# EAGLE board LabAccessBoard (EAGLE 9.2.2)
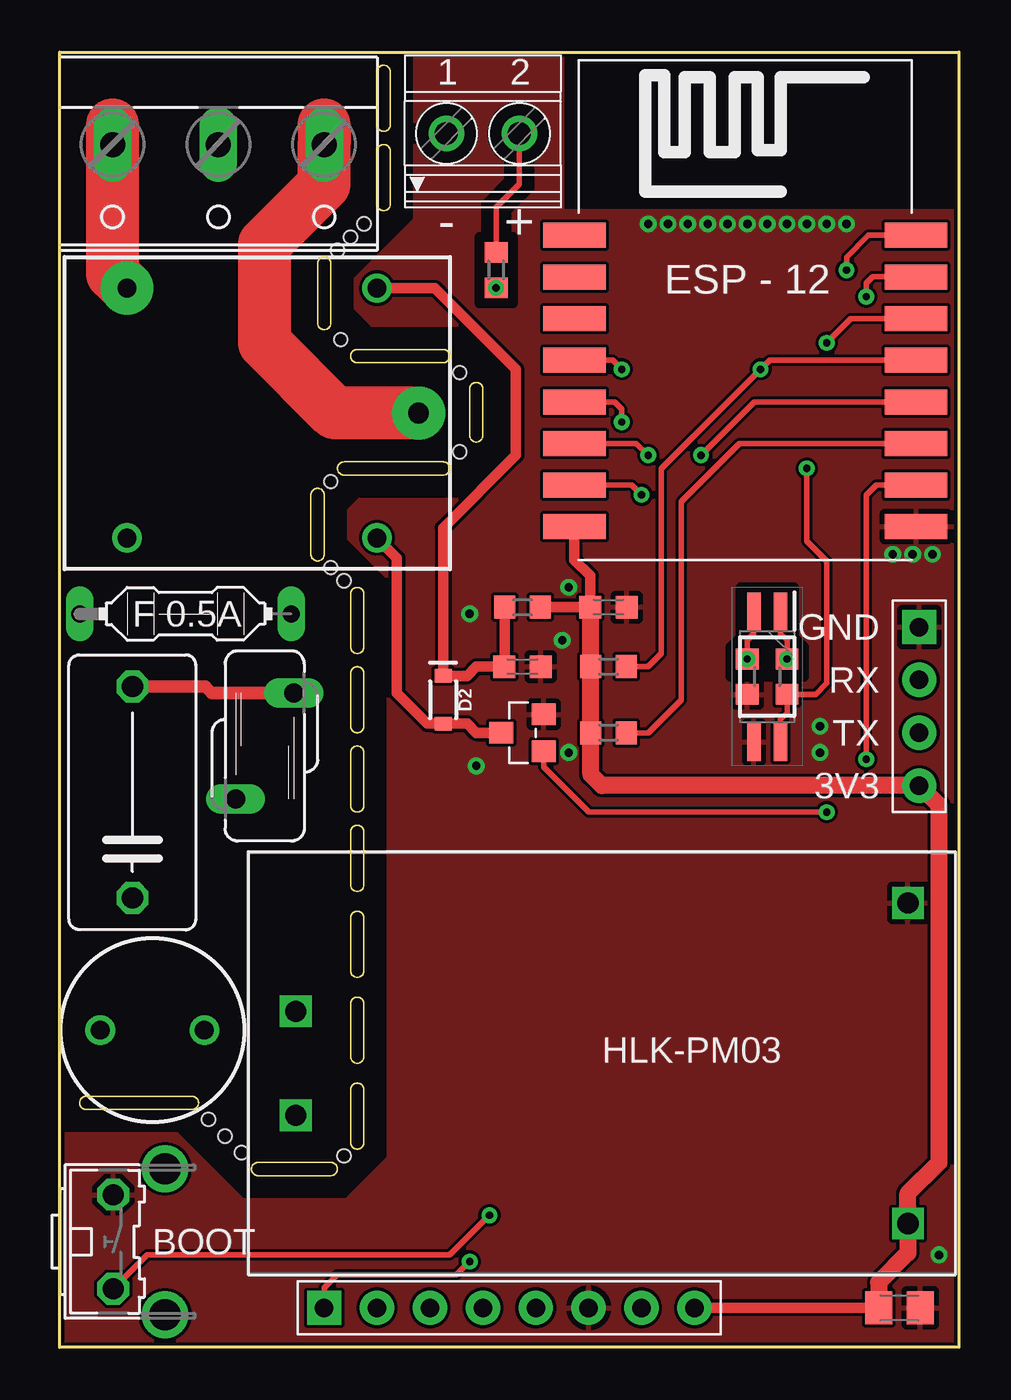
[diagram p0: board, top side]
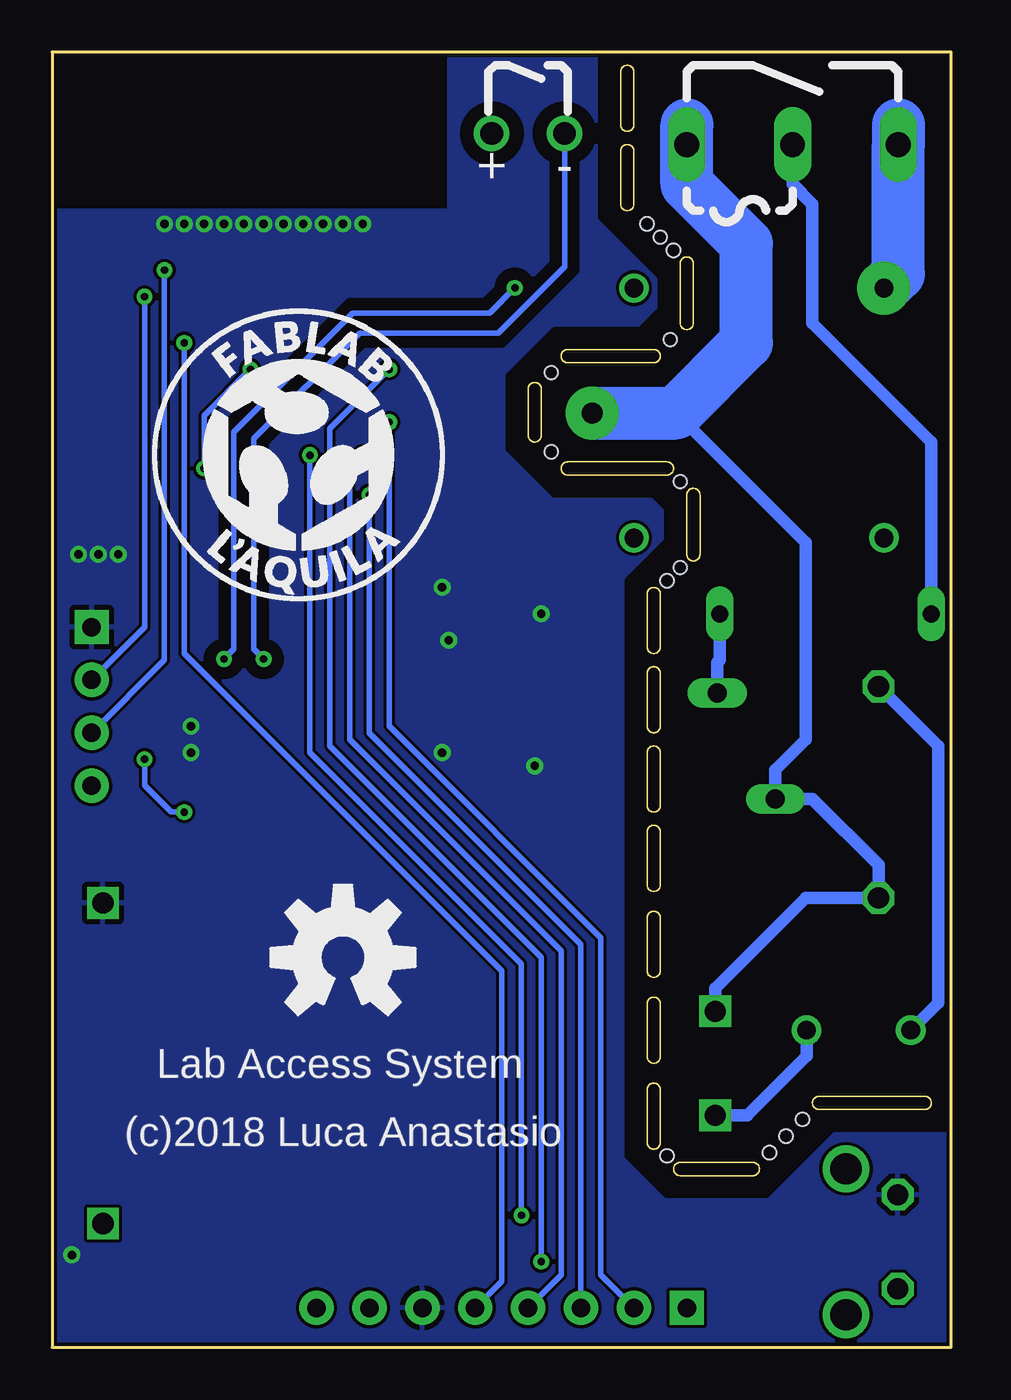
[diagram p1: board, bottom side, seen from below]

Size 43.18 x 62.23 mm. Coordinates in mm from the lower left corner, seen from the top.
Outline: 0,0 0,62.23 43.18,62.23 43.18,0 0,0
Outline: 12.7,52.39 arc90 12.38,52.07 12.38,49.21 arc90 12.7,48.9 arc90 13.02,49.21 13.02,52.07 arc90 12.7,52.39
Outline: 15.56,57.78 arc90 15.24,57.47 15.24,54.93 arc90 15.56,54.61 arc90 15.88,54.93 15.88,57.47 arc90 15.56,57.78
Outline: 15.56,61.59 arc90 15.24,61.28 15.24,58.74 arc90 15.56,58.42 arc90 15.88,58.74 15.88,61.28 arc90 15.56,61.59
Outline: 14.29,36.51 arc90 13.97,36.2 13.97,33.66 arc90 14.29,33.34 arc90 14.61,33.66 14.61,36.2 arc90 14.29,36.51
Outline: 12.38,41.27 arc90 12.06,40.96 12.06,38.1 arc90 12.38,37.78 arc90 12.7,38.1 12.7,40.96 arc90 12.38,41.27
Outline: 13.97,47.62 arc90 14.29,47.31 18.41,47.31 arc90 18.73,47.62 arc90 18.41,47.94 14.29,47.94 arc90 13.97,47.62
Outline: 13.34,42.23 arc90 13.65,41.91 18.41,41.91 arc90 18.73,42.23 arc90 18.41,42.55 13.65,42.55 arc90 13.34,42.23
Outline: 20,46.35 arc90 19.68,46.04 19.68,43.81 arc90 20,43.5 arc90 20.32,43.81 20.32,46.04 arc90 20,46.35
Outline: 14.29,32.7 arc90 13.97,32.38 13.97,29.84 arc90 14.29,29.53 arc90 14.61,29.84 14.61,32.38 arc90 14.29,32.7
Outline: 14.29,28.89 arc90 13.97,28.57 13.97,26.04 arc90 14.29,25.72 arc90 14.61,26.04 14.61,28.57 arc90 14.29,28.89
Outline: 14.29,25.08 arc90 13.97,24.77 13.97,22.23 arc90 14.29,21.91 arc90 14.61,22.23 14.61,24.77 arc90 14.29,25.08
Outline: 14.29,20.95 arc90 13.97,20.64 13.97,18.1 arc90 14.29,17.78 arc90 14.61,18.1 14.61,20.64 arc90 14.29,20.95
Outline: 14.29,16.83 arc90 13.97,16.51 13.97,13.97 arc90 14.29,13.65 arc90 14.61,13.97 14.61,16.51 arc90 14.29,16.83
Outline: 14.29,12.7 arc90 13.97,12.38 13.97,9.84 arc90 14.29,9.53 arc90 14.61,9.84 14.61,12.38 arc90 14.29,12.7
Outline: 0.95,11.75 arc90 1.27,11.43 6.35,11.43 arc90 6.67,11.75 arc90 6.35,12.06 1.27,12.06 arc90 0.95,11.75
Outline: 9.21,8.57 arc90 9.53,8.26 13.02,8.26 arc90 13.34,8.57 arc90 13.02,8.89 9.53,8.89 arc90 9.21,8.57
Copper layers (1*16): Top 0.035mm / dielectric 1.5mm / Bottom 0.035mm
Design rules "default *": minimum track width 6mil, minimum drill 0.35mm, track to track 6mil, track to pad 6mil, pad to pad 6mil, via to via 6mil, smd to smd 6mil, copper to edge 6mil, drill to drill 6mil, minimum pad ring 10mil, minimum via ring 8mil, stop-mask expansion 4mil, vias tented up to drill 20mil, thermal gap 10mil
Holes 0.64 mm at 13.97,53.34 13.34,52.7 14.61,53.98 13.49,48.42 19.21,46.83 19.21,43.02 13.02,41.59 13.02,37.47 13.65,36.83 13.65,9.21 7.94,10.16 7.14,10.95 8.73,9.37
tRestrict: area 20.8,57 to 23.3,59.6; area 17.3,57 to 19.8,59.6; area 24.4,54.9 to 43.2,62.2; 59 lines
bRestrict: area 17.3,57 to 19.8,59.6; area 20.8,57 to 23.3,59.6; area 32.3,32.4 to 33.7,33.8; area 20.2,50.2 to 21.7,51.6; area 34.2,32.4 to 35.6,33.8; area 24.4,54.9 to 43.2,62.2; 49 lines

## Footprints (pad centres in the part's own frame; a part is rotated, then mirrored left to right if it is on the bottom)
C0603K = smd 1.05 x 1.08: 1 -0.875,0; 2 0.875,0
C0805K = smd 1.3 x 1.6: 1 -1,0; 2 1,0
C102-064X133 = drill 1.016 octagon: 1 -5.08,0; 2 5.08,0
SOD-323 = smd 0.63 x 0.83: A 1.15,0; C -1.15,0
PICOFUSE = drill 0.813 long: 1 -5.08,0; 2 5.08,0
HLK-PM01 = drill 1.016 square: P$1 -14.7,2.5; P$2 -14.7,-2.5; P$3 14.7,7.7; P$4 14.7,-7.7
SOIC127P700X190-4N = smd 1.8 x 0.65: 1 -3.15,0.635; 2 -3.15,-0.635; 3 3.15,-0.635; 4 3.15,0.635
H4-2.54 = drill 0.889 pad 1.651 square: 1 0,3.81 | drill 0.889 pad 1.651: 2 0,1.27; 3 0,-1.27; 4 0,-3.81
H8-2.54 = drill 0.889 pad 1.651 square: 1 0,8.89 | drill 0.889 pad 1.651: 2 0,6.35; 3 0,3.81; 4 0,1.27; 5 0,-1.27; 6 0,-3.81; 7 0,-6.35; 8 0,-8.89
SOT-23 = smd 1.016 x 1.143: 1 -0.889,-1.016; 2 0.889,-1.016; 3 0,1.016
R0603 = smd 1 x 1.1: 1 -0.85,0; 2 0.85,0
S07K250 = drill 0.914 long: 1 -1.397,-2.54; 2 1.397,2.54
B3F-31XX = drill 1.016 octagon: 1 -2.261,-1.245; 2 2.261,-1.245 | drill 1.499 pad 2.159: 3 -3.505,1.245; 4 3.505,1.245
ESP12-SMD = smd 3 x 1.2: ADC -8.3,3.8; CH_PD -8.3,1.8; GND 8.1,-8.2; GPIO0 8.1,-2.2; GPIO2 8.1,-4.2; GPIO4 8.1,1.8; GPIO5 8.1,-0.2; GPIO12 -8.3,-4.2; GPIO13 -8.3,-6.2; GPIO14 -8.3,-2.2; GPIO15 8.1,-6.2; GPIO16 -8.3,-0.2; RESET -8.3,5.8; RXD0 8.1,3.8; TXD0 8.1,5.8; VCC -8.3,-8.2
SRD-0XVDC-SL-C = drill 0.9: COIL0 -5.39,-6.12; COIL1 -5.39,5.88; SWCLOSED 6.61,5.88 | drill 1 pad 2.54: SWCOMMON -7.39,-0.12 | drill 0.9 pad 2.54: SWOPEN 6.61,-6.12
6000-XXXX-RC = drill 0.9 pad 1.422: 1 -2.5,0; 2 2.5,0
1751248 = drill 1.1 pad 1.7: 1 -1.75,-0.1; 2 1.75,-0.1
W237-3E = drill 1.194 long: 1 -5.08,-0.635; 2 0,-0.635; 3 5.08,-0.635

## Placement (x,y rotation side)
C1  1uF  [C0603K]  22.23,32.7 0 top
C2  10uF  [C0805K]  40.32,1.91 180 top
C5  100nF  [C102-064X133]  3.49,26.67 90 top
C6  1uF  [C0603K]  26.35,35.56 180 top
D2  250mA/100V  [SOD-323]  18.41,31.11 270 top
F1  FUSEPICOFUSE  [PICOFUSE]  6.03,35.24 0 top
HLK-PM03  HLK-PM03  [HLK-PM01]  26.04,13.65 0 top
IC1  TLP281  [SOIC127P700X190-4N]  33.97,32.23 270 top
J1  4p-2.54  [H4-2.54]  41.27,30.8 0 top
JP1  8p-2.54  [H8-2.54]  21.59,1.91 90 top
Q1  AO3400  [SOT-23]  22.23,29.53 90 top
R1  ROC  [R0603]  20.95,51.75 270 top
R2  0  [R0603]  34.92,32.23 270 top
R3  10k  [R0603]  26.35,29.53 0 top
R4  250V  [S07K250]  9.84,28.89 180 top
R5  2R  [R0603]  22.23,35.56 180 top
R6  RSW  [R0603]  26.35,32.7 0 top
R7  0  [R0603]  33.02,32.23 270 top
S1  [B3F-31XX]  3.81,5.08 270 top
U1  [ESP12-SMD]  33.02,47.62 0 top
U$1  SRD-03VDC-SL-C  [SRD-0XVDC-SL-C]  9.84,44.77 180 top
U$2  10mH  [6000-XXXX-RC]  4.45,15.24 180 top
U$3  [OSHW-LOGO-L]  29.21,18.73 0 bottom
X1  1751248  [1751248]  20.32,58.42 0 top
X2  [W237-3E]  7.62,57.15 180 top

## Library data of the parts
C1 C2 C5 C6 = rcl; SPICEPREFIX: C
D2 = SparkFun-DiscreteSemi; PROD_ID: DIO-09646
F1 = fuse; OC_FARNELL: unknown; OC_NEWARK: unknown
HLK-PM03 = HLK-PM01
IC1 = TLP281(GB-TP_F); ARROW_PART_NUMBER: TLP281(GB-TP,F); DESCRIPTION: PROGRAMMABLE CONTROLLERS AC/DC-INPUT MODULE PC CARD MODEM(PCMCIA); HEIGHT: 1.9mm; MANUFACTURER_NAME: Toshiba; MANUFACTURER_PART_NUMBER: TLP281(GB-TP,F)
J1 = Seeed-Connector; MPN: P125-1104A0BS116A1
JP1 = Seeed-Connector; MPN: P125-1108A1BS116A1
Q1 = Seeed-Transistor; MPN: 2N7002,215
R1-R3 R5-R7 = resistor
R4 = varistor
S1 = switch-omron; MPN: B3F-3100; OC_FARNELL: 959704; OC_NEWARK: 36M3582
U1 = esp8266modules
U$1 = SRD-0XVDC-SL-C
U$2 = rcl; SPICEPREFIX: L
U$3 = SparkFun-Aesthetics
X1 = con-phoenix-350; OC_FARNELL: unknown; OC_NEWARK: unknown
X2 = con-wago-508; OC_FARNELL: unknown; OC_NEWARK: unknown

## Nets
+3V3: C2.2 C6.2 HLK-PM03.P$4 J1.4 JP1.8 R3.1 R5.1 R6.1 U1.VCC
A: IC1.1 R1.2 R2.1
ADC: U1.ADC
CS: JP1.1 U1.GPIO16
EXTSW: IC1.4 R2.2 R6.2 U1.GPIO5
GND: C1.2 C2.1 C6.1 HLK-PM03.P$3 IC1.3 J1.1 JP1.6 Q1.2 R7.2 S1.1 U1.GND
GPIO2: R3.2 U1.GPIO2
IRQ: JP1.5 U1.GPIO4
K: IC1.2 R7.1 X1.1
MISO: JP1.4 U1.GPIO12
MOSI: JP1.3 U1.GPIO13
N$1: U$1.SWOPEN X2.3
N$2: C5.1 HLK-PM03.P$1 R4.2 U$1.SWCOMMON X2.1
N$3: C5.2 F1.2 R4.1 U$2.2
N$4: F1.1 X2.2
N$5: C1.1 D2.C R5.2 U$1.COIL0
N$6: HLK-PM03.P$2 U$2.1
N$8: D2.A Q1.3 U$1.COIL1
N$9: R1.1 X1.2
RLY: Q1.1 U1.GPIO15
RX: J1.2 U1.RXD0
SCK: JP1.2 U1.GPIO14
SW: S1.2 U1.GPIO0
TX: J1.3 U1.TXD0

## Tracks (layer width: path | path; a pad name or v marks a point on that pad's centre or on a via)
+3V3
  Top 0.508: U1.VCC 24.72,37.83 25.48,37.07 C6.2 R5.1 | C2.2 JP1.8
  Top 0.813: C6.2 25.5,35.53 R6.1 R3.1 25.5,27.52 26.04,26.99 J1.4 42.23,26.04 42.23,8.89 40.73,7.4 HLK-PM03.P$4 40.73,4.54 39.32,3.13 C2.2
A  (via drill 0.35)
  Top 0.254: IC1.1 34.61,34.29 34.92,33.97 R2.1
  Bottom 0.254: R1.2 22.17,49.69 28.73,49.69 34.45,43.97 34.45,33.55 R2.1
  other vias: 20.95,50.9 34.92,33.08
CS  (via drill 0.35)
  Top 0.254: JP1.1 12.7,2.86 13.34,3.49 19.05,3.49 v19.68,4.13 | U1.GPIO16 26.55,47.42 v26.99,46.99
  Bottom 0.254: v19.68,4.13 19.68,18.73 29.84,28.89 29.84,44.13 v26.99,46.99
EXTSW  (via drill 0.35)
  Top 0.254: R6.2 28.26,32.7 28.89,33.34 28.89,42.23 v33.66,46.99 34.09,47.42 U1.GPIO5 | IC1.4 34.61,30.16 34.92,30.48 R2.2 36.3,31.38 36.83,31.91 36.83,37.78 35.88,38.73 v35.88,42.23
  Bottom 0.254: v35.88,42.23 35.88,44.77 v33.66,46.99
GND  (via drill 0.4)
  other vias: 41.91,38.1 40.96,38.1 40.01,38.1 30.16,53.98 36.51,28.57 19.68,35.24 20,27.94 31.11,53.98 33.02,53.98 32.07,53.98 33.97,53.98 34.92,53.98 35.88,53.98 36.83,53.98 37.78,53.98 29.21,53.98 28.26,53.98 24.45,36.51 24.13,33.97 24.45,28.57 42.23,4.45 36.51,29.84
  pour Top: 0,0 0,10.48 5.71,10.48 8.89,7.3 13.65,7.3 15.56,9.21 15.56,36.83 13.65,38.73 13.65,40.32 14.29,40.96 19.05,40.96 21.27,43.18 21.27,46.67 19.05,48.9 14.92,48.9 13.97,49.85 13.97,51.44 16.51,53.98 16.51,62.23 24.13,62.23 24.13,54.61 43.18,54.61 43.18,0
  pour Bottom: 16.51,62.23 24.13,62.23 24.13,54.61 43.18,54.61 43.18,0 0,0 0,10.48 5.71,10.48 8.89,7.3 13.65,7.3 15.56,9.21 15.56,36.83 13.65,38.73 13.65,40.32 14.29,40.96 19.05,40.96 21.27,43.18 21.27,46.67 19.05,48.9 14.92,48.9 13.97,49.85 13.97,51.44 16.51,53.98
GPIO2
  Top 0.254: R3.2 28.26,29.53 29.84,31.11 29.84,40.64 32.63,43.42 U1.GPIO2
IRQ  (via drill 0.35)
  Top 0.254: v36.83,48.26 37.99,49.42 U1.GPIO4
  Bottom 0.254: JP1.5 21.59,3.17 21.59,18.1 36.83,33.34 v36.83,48.26
K  (via drill 0.35)
  Top 0.254: IC1.2 33.34,34.29 33.02,33.97 R7.1
  Bottom 0.254: X1.1 18.57,51.91 21.75,48.74 28.42,48.74 33.5,43.66 33.5,33.55 R7.1
  other vias: 33.02,33.08
MISO  (via drill 0.35)
  Top 0.254: v28.26,42.86 27.7,43.42 U1.GPIO12
  Bottom 0.254: JP1.4 18.73,3.49 18.73,19.05 28.89,29.21 28.89,42.23 v28.26,42.86
MOSI  (via drill 0.35)
  Top 0.254: v27.94,40.96 27.47,41.42 U1.GPIO13
  Bottom 0.254: v27.94,40.96 27.94,29.53 17.78,19.37 JP1.3
N$1
  Top 2.54: U$1.SWOPEN 2.54,51.58 2.54,58.74
  Bottom 2.54: U$1.SWOPEN 2.54,51.58 X2.3 2.54,58.74
N$2
  Top 2.54: U$1.SWCOMMON 13.21,44.89 9.84,48.26 9.84,53.02 12.7,55.88 X2.1 12.7,58.74
  Bottom 0.61: HLK-PM03.P$1 11.34,17.24 6.99,21.59 C5.1 3.49,23.18 6.67,26.35 R4.2 8.45,27.75 6.99,29.21 6.99,38.66 13.21,44.89
  Bottom 2.54: U$1.SWCOMMON 13.21,44.89 9.84,48.26 9.84,53.02 12.7,55.88 12.7,58.74
N$3
  Top 0.61: C5.2 6.99,31.75 7.3,31.43 R4.1
  Bottom 0.61: C5.2 0.64,28.89 0.64,16.55 U$2.2 | F1.2 11.11,33.02 11.24,32.89 R4.1
N$4
  Bottom 0.61: X2.2 7.62,55.88 6.67,54.93 6.67,49.21 0.95,43.5 F1.1
N$5
  Top 0.508: U$1.COIL0 18.01,50.89 21.91,46.99 21.91,42.86 18.41,39.37 D2.C 19.57,32.27 20,32.7 21.38,32.7 | R5.2 21.38,32.7 | 21.38,32.7 21.38,32.55 C1.1
N$6
  Bottom 0.61: HLK-PM03.P$2 9.8,11.15 6.95,14.01 U$2.1
N$8
  Top 0.508: U$1.COIL1 16.19,37.93 16.19,31.43 17.66,29.96 D2.A 19.57,29.96 20,29.53 Q1.3
N$9
  Top 0.254: R1.1 20.95,54.77 22.07,55.88 X1.2
RLY  (via drill 0.35)
  Top 0.254: v38.73,28.26 38.73,40.96 39.2,41.42 U1.GPIO15 | v36.83,25.72 25.4,25.72 23.24,27.88 Q1.1
  Bottom 0.254: v36.83,25.72 37.47,25.72 38.73,26.99 v38.73,28.26
RX  (via drill 0.35)
  Top 0.254: U1.RXD0 41.11,51.44 39.05,51.44 38.73,51.12 v38.73,50.48
  Bottom 0.254: v38.73,50.48 38.73,34.61 J1.2
SCK  (via drill 0.35)
  Top 0.254: U1.GPIO14 26.65,45.42 26.99,45.09 v26.99,44.45
  Bottom 0.254: JP1.2 16.83,3.49 16.83,19.68 26.99,29.84 v26.99,44.45
SW  (via drill 0.35)
  Top 0.254: S1.2 4.19,4.45 18.73,4.45 v20.64,6.35 | v30.8,42.86 33.36,45.42 U1.GPIO0
  Bottom 0.254: v20.64,6.35 20.64,18.41 30.8,28.57 v30.8,42.86
TX  (via drill 0.35)
  Top 0.254: U1.TXD0 38.82,53.42 37.78,52.39 v37.78,51.75
  Bottom 0.254: v37.78,51.75 37.78,33.02 J1.3

## Text on the board
tPlace: - | + | F 0.5A | GND | RX | TX | 3V3 | BOOT
bPlace: - | + | Lab Access System | (c)2018 Luca Anastasio